# Altium PCB sensirion.PcbDoc
Units mil, origin at the board's own origin, x right, y up, seen from the top; angles counter-clockwise.
Board outline 6000 x 4000 mil, 2 copper layers (Top Layer, Bottom Layer); 60 components, 70 nets, 364 pads, 27 vias.
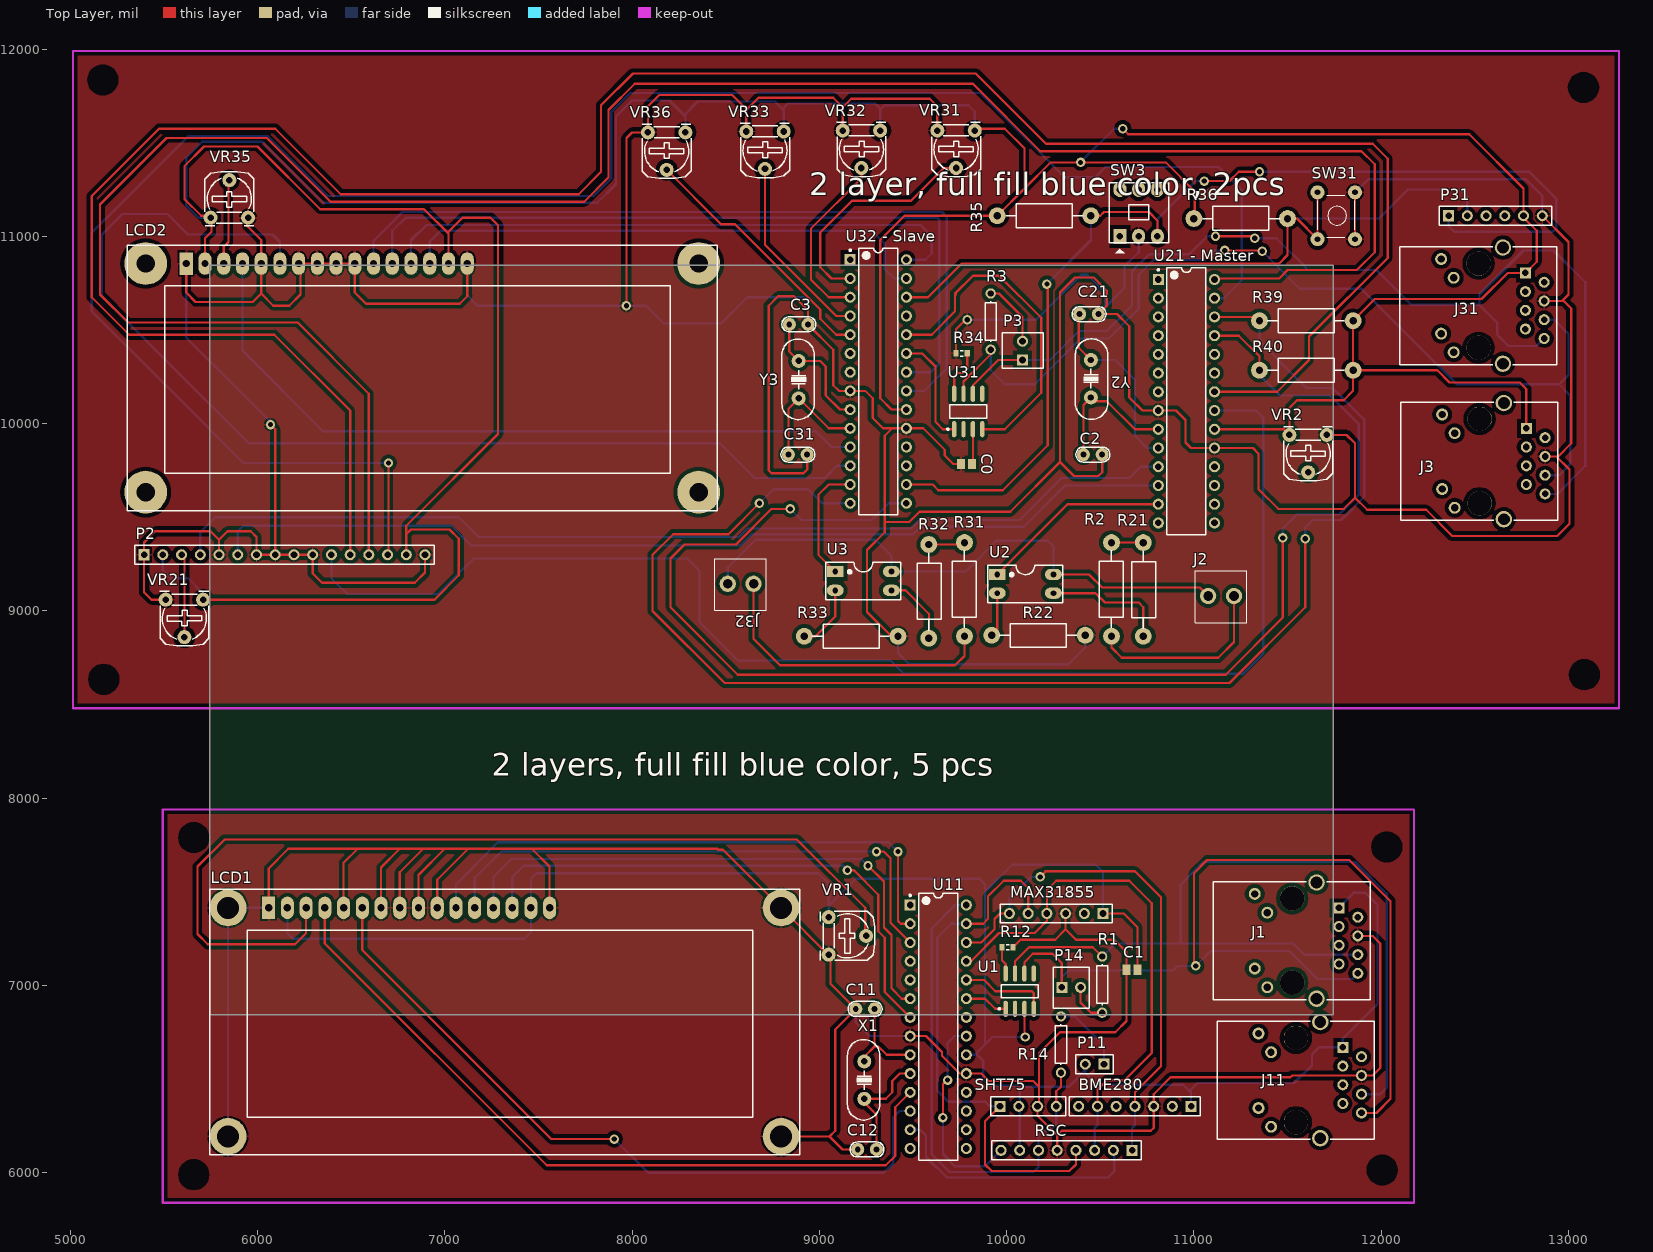
[diagram p0: Top Layer view]
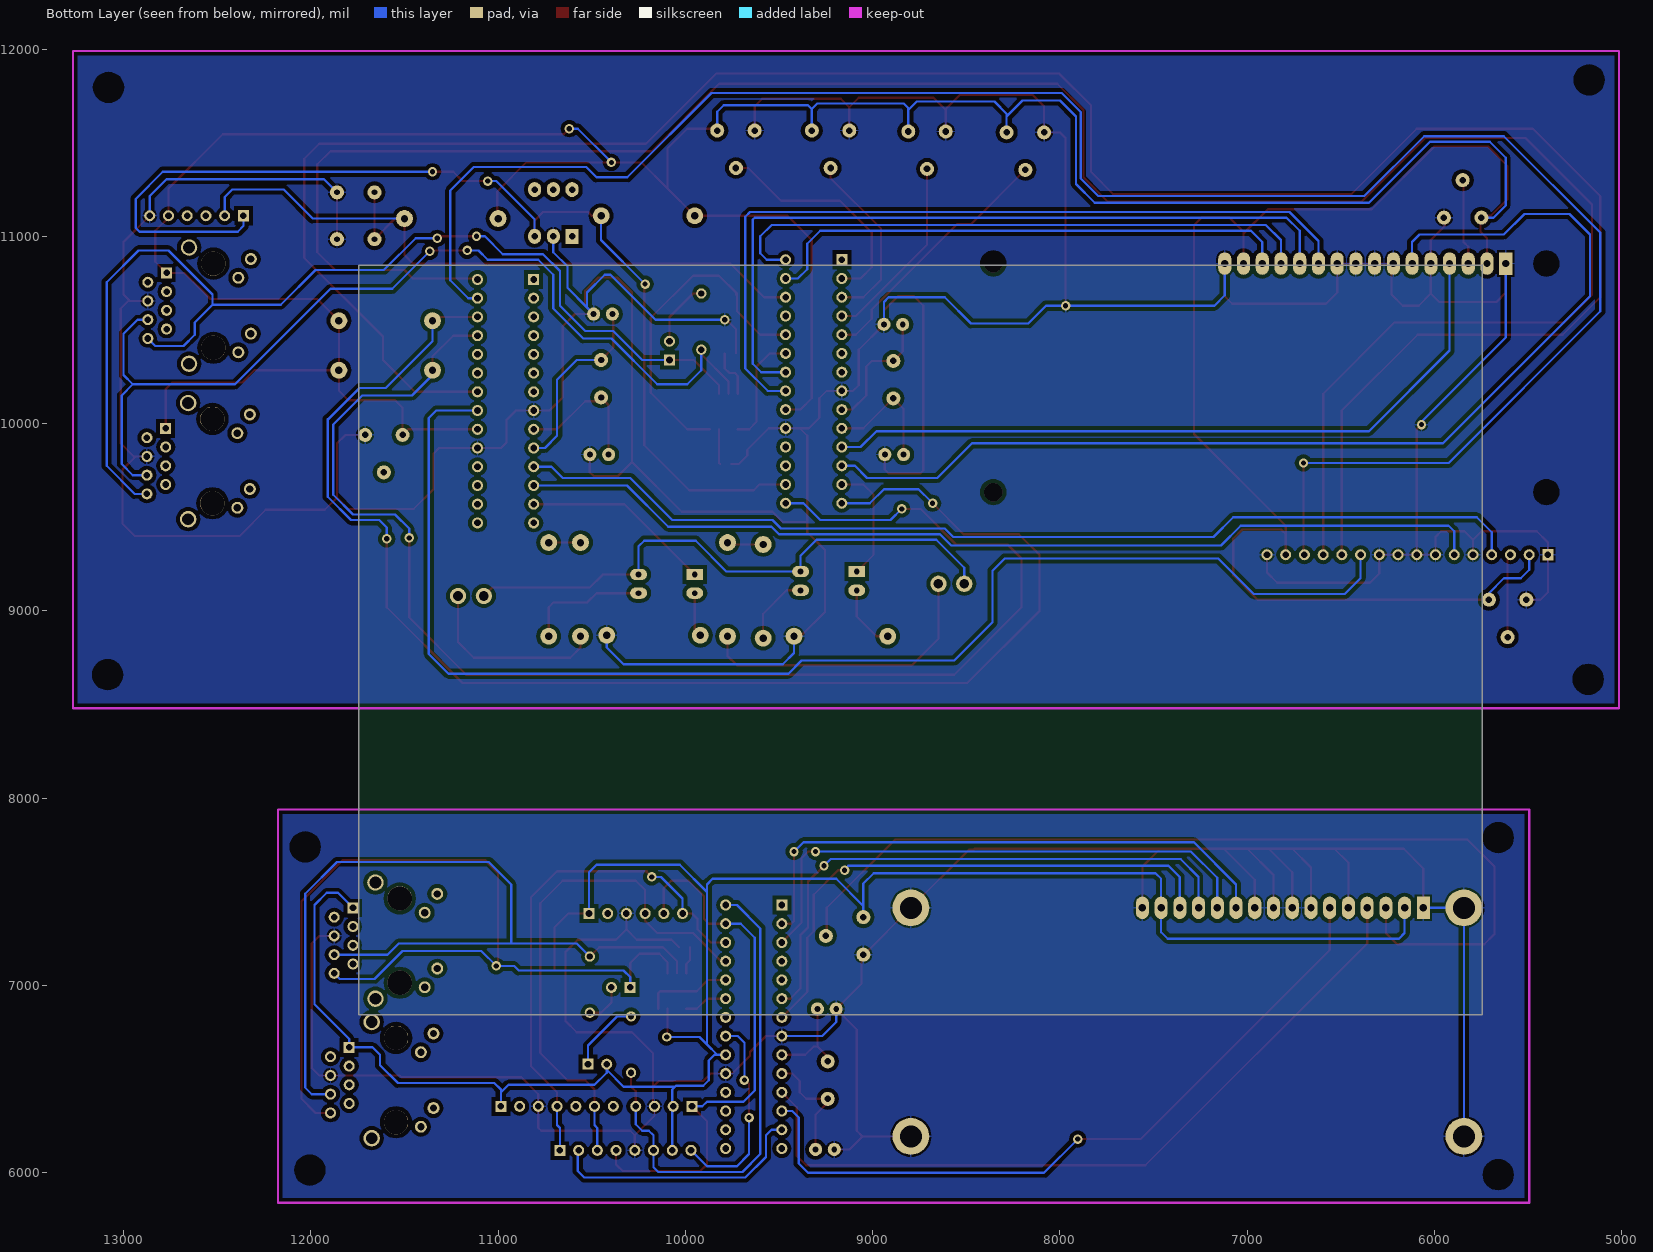
[diagram p1: Bottom Layer view, seen from below]

## Layer stack, top to bottom
Top Solder: solder mask 0.4, Solder Resist, Dk 3.5
Top Layer: signal copper 1.4
Dielectric 1: dielectric 12.6, FR-4, Dk 4.8
Bottom Layer: signal copper 1.4
Bottom Solder: solder mask 0.4, Solder Resist, Dk 3.5

## Board outline
5745,6845 11745,6845 11745,10845 5745,10845

## Design rules (kind name [scope] priority, off if disabled: settings)
Clearance "PolyGon Pour Clearance" [InPolyGon] p1: gap=20 ignorepadtopadclearanceinfootprint=FALSE except(0: Arc-Hole Track-Hole SMDPad-Hole THPad-Hole Via-Hole Fill-Hole Poly-Hole Region-Hole Text-Hole)
Clearance [All] p2: gap=14 ignorepadtopadclearanceinfootprint=FALSE except(0: Arc-Hole Track-Hole SMDPad-Hole THPad-Hole Via-Hole Fill-Hole Poly-Hole Region-Hole Text-Hole)
PolygonConnect [All] p1: connectstyle=Relief reliefconductorwidth=10 reliefentries=4 polygonreliefangle="90 Angle" airgapwidth=10
RoomDefinition BSD_Test_LM2596 [InComponentClass('BSD_Test_LM2596')] p1: confinementstyle=ConfineIn formatcopy=TRUE lockcomponents=FALSE outline 11790,6905 11930,6905 11930,7095 11790,7095
RoutingVias [All] p1: holewidth=28 width=50 viastyle="Through Hole" minholewidth=28 minwidth=50 maxholewidth=28 maxwidth=50
SolderMaskExpansion [All] p1: expansion=4
Width VCC1 [(InNet('VCC1') AND InNet('VCC'))] p1: maxlimit=14 minlimit=14 preferedwidth=14
Width [All] p2: maxlimit=12 minlimit=12 preferedwidth=12
30 further rules are at their usual default settings.

## Components (designator, comment, footprint, x,y, rotation, side; value= is the part's Value field where it differs from the comment)
BME280 "Header 7" HDR1X7 10985,6355 r180 top
C0 "Cap Pol3" C0805 9785,9785 r180 top
C1 "Cap Pol3" C0805 10670,7085 r180 top
C2 "22pF" CN1#1 10410,9835 r0 top
C3 "22pF" CN1#1 8840,10530 r0 top
C11 "22pF" CN1#2 9245,6875 r180 top
C12 "22pF" CN1#2 9255,6125 r180 top
C21 "22pF" CN1#1 10390,10585 r0 top
C31 "22pF" CN1#1 8835,9835 r0 top
J1 "CON Ethernet" Ethernet 11525,7240 r270 top
J2 "KF2" KF2-3.5 11145,9080 r0 top
J3 "CON Ethernet" Ethernet 12525,9800 r270 top
J11 "CON Ethernet" Ethernet 11545,6495 r270 top
J31 "CON Ethernet" Ethernet 12520,10630 r270 top
J32 "KF2" KF2-3.5 8580,9145 r0 top
LCD1 "LCD16x2A" LCD16X2#1 6060,7415 r0 top
LCD2 "LCD16x2A" LCD16X2#2 5620,10855 r0 top
MAX31855 "Header 6" HDR1X6 10515,7385 r180 top
P2 "Header 16" HDR1X16 5395,9300 r0 top
P3 "Header2" HDR2 10085,10340 r90 top
P11 "Header 2" HDR1X2 10520,6580 r180 top
P14 "Header2" HDR2 10295,6990 r0 top
P31 "Header 6" HDR1X6 12360,11110 r0 top
R1 "120" AXIAL-0.3 10510,7005 r270 top
R2 "100" R1W 10560,8865 r90 top
R3 "120" AXIAL-0.3 9915,10545 r90 top
R12 "Res3" J1-0603 10005,7205 r0 top
R14 "470" AXIAL-0.3 10290,6685 r270 top
R21 "100" R1W 10730,9365 r270 top
R22 "100" R1W 10420,8870 r180 top
R31 "100" R1W 9775,8865 r90 top
R32 "100" R1W 9585,9355 r270 top
R33 "100" R1W 9420,8865 r180 top
R34 "Res3" J1-0603 9760,10375 r180 top
R35 "10k" R1W 9950,11110 r0 top
R36 "10k" R1W 11000,11095 r0 top
R39 "4k7" R1W 11850,10550 r180 top
R40 "4k7" R1W 11850,10285 r180 top
RSC "Header 8" HDR1X8 10670,6120 r180 top
SHT75 "Header 4" HDR1X4 9965,6355 r0 top
SW3 "Switch 3x2" SW3-DIP 10705,11130 r90 top
SW31 "SW" SW4 11860,11235 r270 top
U1 "MCP2551-E/SN" SOIC-SN8_N 10070,6970 r90 top
U2 "PC817" DIP4 9950,9195 r270 top
U3 "PC817" DIP4 9085,9210 r270 top
U11 "PIC18LF2480-I/SP" SPDIP300-SP28 9635,6780 r0 top
"U21 - Master" "PIC18LF2480-I/SP" SPDIP300-SP28 10960,10120 r0 top
U31 "MCP2551-E/SN" SOIC-SN8_N 9795,10065 r90 top
"U32 - Slave" "PIC18LF2480-I/SP" SPDIP300-SP28 9315,10225 r0 top
VR1 "10K" VR 9050,7365 r270 top
VR2 "10K" VR 11710,9940 r180 top
VR21 "10K" VR 5710,9060 r180 top
VR31 "10K" VR 9830,11565 r180 top
VR32 "10K" VR 9325,11565 r180 top
VR33 "10K" VR 8810,11560 r180 top
VR35 "10K" VR 5750,11100 r0 top
VR36 "10K" VR 8285,11555 r180 top
X1 "12Mhz" XT2 9240,6495 r90 top
Y2 "12Mhz" XT2 10450,10240 r270 top
Y3 "12Mhz" XT2 8890,10235 r90 top

## Footprints (in the part's own frame and the unit in brackets; to place one, negate y for a bottom-side part, rotate by r counter-clockwise, add the part's x,y. Pads: shape width x height; smd on the part's side, far side on the other; paste and mask are expansions set on the pad)
AXIAL-0.3 [mm] "Axial Device, Thru-Hole; 2 Leads; 0.3 in Pin Spacing"
  round 1.4 hole 0.85: 1(-3.81,0) 2(3.81,0)
  silkscreen extent -2.77,-0.76 2.77,0.76
C0805 [mm] "Chip Capacitor, Body 2.0x1.3mm, IPC High Density"
  rect 1.1x1.4 smd: 1(-0.75,0) 2(0.75,0)
  body extent -1.1,-0.72 1.1,0.72, height 1.4
CN1#1 [mil]
  round 70 hole 31: 1(0,0) 2(100,0)
  silkscreen extent -40,-40 141,40, body extent -60,-30 170,37, height 265
CN1#2 [mil]
  round 70 hole 31: 1(-50,0) 2(50,0)
  silkscreen extent -90,-40 91,40, body extent -115,-33 115,33, height 265
DIP4 [mil]
  rect 60x90 hole 31: 1(0,0)
  oval 60x90 hole 31: 2(100,0) 3(100,300) 4(0,300)
  silkscreen extent -50,-50 150,350, body extent -59,-10 159,305, height 170
Ethernet [mm] "Connector; PCB Jack, Thru-Hole; 1-Port, 8 Positions, 8 Loaded; Shielded without Lightpipes; Vertical"
  rect 1.5x1.5 hole 0.9: 1(-4.445,6.35)
  round 1.5 hole 0.9: 2(-3.175,8.89) 3(-1.905,6.35) 4(-0.635,8.89) 5(0.635,6.35) 6(1.905,8.89) 7(3.175,6.35)
  round 1.5 hole 0.9 mask+0: 8(4.445,8.89)
  round 1.62 hole 1: 9(-6.325,-5.08) 11(3.785,-5.08) 12(6.325,-3.38)
  round 1.62 hole 1 mask+0: 10(-3.785,-3.38)
  round 2.23 hole 1.6: MH1(-7.875,3.3) MH2(7.875,3.3)
  round 3.3 hole 3.3 unplated: MH3(-5.715,0) MH4(5.715,0)
  silkscreen extent -8,-10.7 8,10.6, body extent -7.9,-145.27 7.97,10.6, height 24.61
HDR1X2 [mm] "Connector; Header; 2 Position"
  rect 1.5x1.5 hole 0.9: 1(0,0)
  round 1.5 hole 0.9: 2(2.54,0)
  silkscreen extent -1.27,-1.27 3.81,1.27
HDR1X4 [mm] "Connector; Header; 4 Position"
  rect 1.5x1.5 hole 0.9: 1(0,0)
  round 1.5 hole 0.9: 2(2.54,0) 3(5.08,0) 4(7.62,0)
  silkscreen extent -1.27,-1.27 8.89,1.27
HDR1X6 [mm] "Connector; Header; 6 Position"
  rect 1.5x1.5 hole 0.9: 1(0,0)
  round 1.5 hole 0.9: 2(2.54,0) 3(5.08,0) 4(7.62,0) 5(10.16,0) 6(12.7,0)
  silkscreen extent -1.27,-1.27 13.97,1.27
HDR1X7 [mm] "Connector; Header; 7 Position"
  rect 1.5x1.5 hole 0.9: 1(0,0)
  round 1.5 hole 0.9: 2(2.54,0) 3(5.08,0) 4(7.62,0) 5(10.16,0) 6(12.7,0) 7(15.24,0)
  silkscreen extent -1.27,-1.27 16.51,1.27
HDR1X8 [mm] "Connector; Header; 8 Position"
  rect 1.5x1.5 hole 0.9: 1(0,0)
  round 1.5 hole 0.9: 2(2.54,0) 3(5.08,0) 4(7.62,0) 5(10.16,0) 6(12.7,0) 7(15.24,0) 8(17.78,0)
  silkscreen extent -1.27,-1.27 19.05,1.27
HDR1X16 [mm] "Connector; Header; 16 Position"
  rect 1.5x1.5 hole 0.9: 1(0,0)
  round 1.5 hole 0.9: 2(2.54,0) 3(5.08,0) 4(7.62,0) 5(10.16,0) 6(12.7,0) 7(15.24,0) 8(17.78,0) 9(20.32,0) 10(22.86,0) 11(25.4,0) 12(27.94,0) 13(30.48,0) 14(33.02,0) 15(35.56,0) 16(38.1,0)
  silkscreen extent -1.27,-1.27 39.37,1.27
HDR2 [mm] "Connector; Header; 2 Position"
  rect 1.5x1.5 hole 0.9: 1(0,0)
  round 1.5 hole 0.9: 2(2.54,0)
  silkscreen extent -1.14,-2.79 3.68,2.77, body extent -1.27,-2.92 3.81,2.88, height 11.72
J1-0603 [mm] "Chip Resistor, Body 1.6x0.8mm, IPC High Density"
  rect 0.7x0.9 smd: 1(-0.75,0) 2(0.75,0)
  silkscreen extent -0.2,-0.35 0.2,0.35, body extent -0.85,-0.48 0.85,0.48, height 0.9
KF2-3.5 [mm] "3,50mm - modular - blue - Horizontal wire entry - Pressure clamp - 8,4mm height - 02p"
  round 2.2 hole 1.3: 1(-1.75,0) 2(1.75,0)
  silkscreen extent -3.5,-3.6 3.5,3.4, body extent -3.95,-3.6 4.05,3.4, height 8.41
LCD16X2#1 [mm] "LCD dipslay 16x2, 16 pin"
  round 5 hole 3: 1(-5.5,-31) 1(-5.5,0) 1(69.5,-31) 1(69.5,0)
  rect 1.778x3.048 hole 1: 1(0,0)
  oval 1.778x3.048 hole 1: 2(2.54,0) 3(5.08,0) 4(7.62,0) 5(10.16,0) 6(12.7,0) 7(15.24,0) 8(17.78,0) 9(20.32,0) 10(22.86,0) 11(25.4,0) 12(27.94,0) 13(30.48,0) 14(33.02,0) 15(35.56,0) 16(38.1,0)
  round 0 all layers, no hole: ""(-5.5,0)
  silkscreen extent -8,-33.5 72,2.5, body extent -7.87,-33.96 72.64,2.54, height 18.14
LCD16X2#2 [mm] "LCD dipslay 16x2, 16 pin"
  rect 1.778x3.048 hole 1: 1(0,0)
  oval 1.778x3.048 hole 1: 2(2.54,0) 3(5.08,0) 4(7.62,0) 5(10.16,0) 6(12.7,0) 7(15.24,0) 8(17.78,0) 9(20.32,0) 10(22.86,0) 11(25.4,0) 12(27.94,0) 13(30.48,0) 14(33.02,0) 15(35.56,0) 16(38.1,0)
  round 5.8 / inner round 0 / far side round 0 hole 2.5 unplated: M1(-5.5,0) M2(69.5,0) M3(-5.5,-31) M4(69.5,-31)
  silkscreen extent -8,-33.5 72,2.5, body extent -8.13,-34.47 72.37,2.03, height 18.14
R1W [mil] "R 1W, 2 pin, 500mil"
  round 90 hole 39.37: 1(0,0) 2(500,0)
  silkscreen extent 46,-63 460,65
SOIC-SN8_N [mm] "SOIC, 8-Leads, Body 4.9x3.8mm, Pitch 1.27mm, IPC Medium Density"
  oval 2.2x0.6 smd: 1(-2.4,1.905) 2(-2.4,0.635) 3(-2.4,-0.635) 4(-2.4,-1.905) 5(2.4,-1.905) 6(2.4,-0.635) 7(2.4,0.635) 8(2.4,1.905)
  silkscreen extent -2.52,-2.5 0.9,2.88, body extent -2,-2.5 2,2.5, height 1.75
SPDIP300-SP28 [mm] "DIP, 28-Leads, Row Spacing 7.62mm, Pitch 2.54mm, Body 34.9x6.8mm"
  rect 1.5x1.5 hole 0.9: 1(-3.81,16.51)
  round 1.5 hole 0.9: 2(-3.81,13.97) 3(-3.81,11.43) 4(-3.81,8.89) 5(-3.81,6.35) 6(-3.81,3.81) 7(-3.81,1.27) 8(-3.81,-1.27) 9(-3.81,-3.81) 10(-3.81,-6.35) 11(-3.81,-8.89) 12(-3.81,-11.43) 13(-3.81,-13.97) 14(-3.81,-16.51) 15(3.81,-16.51) 16(3.81,-13.97) 17(3.81,-11.43) 18(3.81,-8.89) 19(3.81,-6.35) 20(3.81,-3.81) 21(3.81,-1.27) 22(3.81,1.27) 23(3.81,3.81) 24(3.81,6.35) 25(3.81,8.89) 26(3.81,11.43) 27(3.81,13.97) 28(3.81,16.51)
  silkscreen extent -3.93,-18.1 2.65,18.1, body extent -3.55,-18.1 3.55,18.1, height 5.08
SW3-DIP [mil] "SW DTDP - 6Pin 260x300x300 mil"
  rect 80x70 hole 35: 1(-130,100)
  oval 80x70 hole 35: 2(-130,0) 3(-130,-100) 4(120,-100) 5(120,0) 6(120,100)
  silkscreen extent -220,-160 155,158, body extent -163,-159 151,155, height 532
SW4 [mil] "SW button 4pin, 250 x250 mil"
  round 75 hole 31: 1(0,0) 2(250,-200) 3(250,0) 4(0,-200)
  silkscreen extent 15,-215 240,0, body extent -36,-220 276,24, height 276
VR [mil] "Resistor Variable"
  round 75 hole 35: 1(0,0) 2(100,200) 3(200,0)
  silkscreen extent -31,-44 231,246, body extent -87,-30 307,372, height 165
XT2 [mil] "Footpin for Crystal 2 pin"
  round 75 hole 34: 1(-100,0) 2(100,0)
  silkscreen extent -213,-83 217,90, body extent -216,-87 216,90, height 144

## Part data
BME280: "Header, 7-Pin"
C0 C1: "Polarized Capacitor (Surface Mount)"
C2 C3 C11 C12 C21 C31: library part CN0, "Cremic For Xtal 1pF => 100pF"
J1 J3 J11 J31: "Socket, PC Jack 8-Way, R/A Low-profile"
LCD1 LCD2: library part LCD16x2, "LCD dipslay 16 char, 2 line"
MAX31855 P31: "Header, 6-Pin"
P2: "Header, 16-Pin"
P3 P14: "Header IDC, 2 x 1 Pin Vertical 2.54mm Pitch (Non-Boxed, Male)"
P11: "Header, 2-Pin"
R1 R3: library part Res, "Res"
R2 R21 R22 R31 R32 R33 R35 R36 R39 R40: library part R1W, "Resistor 1W"
R12 R34: "Resistor"
R14: library part Res1, "Resistor"
RSC: "Header, 8-Pin"
SHT75: "Header, 4-Pin"
SW3: library part SW3x2
SW31: library part SW4, "Switch button 4 pin"
U1 U31: "High-Speed CAN Transceiver, 8-Pin SOIC, Extended Temperature"
U2 U3: "Single Opto"
U11 "U21 - Master" "U32 - Slave": "Enhanced Flash Microcontroller with ECAN Technology, 10-Bit A/D and nanoWatt Technology, 16K Flash, 28-Pin SPDIP, Industrial Temperature Range"
VR1 VR2 VR21 VR31 VR32 VR33 VR35 VR36: library part VR1, "Var Resistor"
X1 Y2 Y3: library part XT2, "Crystal, 32.768 KHz, -40 to 85 degC, 3.2 x 1.5 x 0.9 mm SMD"

## Free pads (board coordinates)
  round 60 hole 125: 0(5660,5990) 1(12005,6015) 2(5660,7790) 3(12030,7740) 4(5175,11835) 5(13080,11795) 6(13085,8660) 7(5180,8635)

## Via types
v1: diameter 50, hole 28, Top Layer to Bottom Layer, 27 vias

## Nets (pads, with @x,y where several pads share a name; then routed paths per layer and width w, separated by ;. In a path a pad name is that pad's centre, name@x,y a point inside that pad or via, vN(x,y) a via of type N, cw(c..) or ccw(c..) an arc to the next point about the centre after c; other vN are vias at no path point)
12VDC: J2.1 J32.1 U2.4 U3.4 | length 3111.4
  Top Layer w12: U2.4 10440,9195 10510,9125 11031.1,9125 J2.1
  Bottom Layer w12: J32.1 8511.1,9231.1 8660,9380 9300,9380 9385,9295 U3.4 9780,9210 9945,9375 10220,9375 10250,9345 U2.4
GND: "U21 - Master.8" "U21 - Master.19" "U32 - Slave.8" "U32 - Slave.19" C0.2 C2.2 C3.2 C21.2 C31.2 J3.4 J31.4 LCD2.1 LCD2.5 LCD2.7 LCD2.8 LCD2.9 LCD2.10 LCD2.16 P2.1 P2.5 P2.7 P2.8 P2.9 P2.10 P2.16 P31.6 R22.1 R33.1 R34.2 SW3.2 SW31.1 SW31.3 VR2.1 VR21.3 VR31.3 VR32.3 VR33.3 VR35.3 VR36.3 | length 29365.1
  Top Layer w12: VR21.3 5435,9060 5395,9100 P2.1 5395,9365 5455,9425 5750,9425 5795,9380 ; LCD2.1 5620,10700 5670,10650 5975,10650 6020,10695 ; P2.5 5795,9380 ; VR35.3@5955,11110 5955,11100 5945,11090 5945,11055 6020,10980 LCD2.5 6020,10695 ; v1(6070,9995) 6095,9970 P2.8 ; LCD2.7 LCD2.8 LCD2.9 LCD2.10 6520,10700 6580,10640 7080,10640 7122.5,10682.5 7120,10685 LCD2.16 ; LCD2.7@6230,10845 6230,10690 6170,10630 6085,10630 6020,10695 ; P2.16 6895,9205 6840,9150 6345,9150 6295,9200 P2.10 P2.9 P2.8 ; v1(7970,10630) 7970,11525 8000,11555 VR36.3 ; VR36.3@8085,11570 8085,11695 8145,11755 8535,11755 8610,11680 8610,11675 ; VR33.3@8610,11575 8610,11675 ; C31.2 8935,9755 8915,9735 8745,9735 8730,9750 8730,10630 8780,10680 8865,10680 8940,10605 C3.2 9075,10395 9075,10205 9105,10175 9165,10175 9245,10175 9285,10135 9285,10030 9340,9975 9390,9975 ; VR32.3@9125,11575 9125,11690 ; R33.1 9385,8865 9255,8995 9255,9325 9350,9420 9350,9475 ; VR31.3@9630,11575 9630,11695 9590,11735 9170,11735 9125,11690 ; R34.2 9730.47,10505.47 9780,10555 v1(9790,10555) ; C0.2 9715,9785 9670,9830 9670,9860 9555,9975 9465,9975 9390,9975 ; C2.2 10510,9740 10490,9720 10360,9720 10285,9795 ; VR2.1 11815,9940 11860,9895 11860,9605 ; SW31.3 SW31.1 ; P31.6 13000,10970 13000,10690 12965,10655 ; J31.4 12965,10655 ; J3.4 12935,9825 ; 5795,9380 5840,9425 5965,9425 5995,9395 P2.7 P2.8 ; 8610,11675 8675,11740 9075,11740 9125,11690 ; 9350,9475 9480,9475 9535,9530 10020,9530 10285,9795 ; 9350,9475 9350,9935 9390,9975 ; 10285,9795 10285,10700 10365,10780 10465,10780 10535,10710 10535,10630 C21.2 10590,10585 10655,10520 10655,10140 10725,10070 10810,10070 10905,10070 10955,10020 10955,9900 10985,9870 11110,9870 11315,9870 11345,9840 11345,9650 11450,9545 11800,9545 11860,9605 ; 11860,9605 11925,9540 12240,9540 12380,9400 12940,9400 13005,9465 13005,9755 12935,9825 ; 12935,9825 12945,9825 13015,9895 13015,10615 12975,10655 12965,10655
  Bottom Layer w12: LCD2.1 5620,10460 6070,10010 v1(6070,9995) ; LCD2.16 7120,10685 7175,10630 8075,10630 8170,10535 8475,10535 8615,10675 8915,10675 8940,10650 C3.2 ; R33.1 9420,8775 9480,8715 10330,8715 10420,8805 R22.1 ; v1@9800,10555 10160,10555 10400,10795 10430,10795 10525,10700 10525,10620 ; C21.2 10525,10620 ; SW3.2 10705,10915 10630,10840 10630,10725 10525,10620 ; SW31.1 11930,11305 12770,11305 12860,11215 P31.6
GND1: BME280.3 C1.2 C11.2 C12.2 J1.4 J11.4 LCD1.1 LCD1.5 LCD1.7 LCD1.8 LCD1.9 LCD1.10 LCD1.16 MAX31855.3 R12.2 RSC.5 SHT75.3 U11.8 U11.19 VR1.3 | length 14857.3
  Top Layer w12: LCD1.1@6060,7415 6060,7625 6165,7730 6535,7730 ; LCD1.5 6460,7655 6535,7730 ; LCD1.7 6660,7630 6760,7730 ; LCD1.8 6760,7605 6885,7730 ; LCD1.9 6860,7590 7000,7730 ; LCD1.10 6960,7565 7125,7730 ; LCD1.16 7560,7635 7465,7730 ; LCD1.1@8796.22,6194.53 9054.53,6194.53 ; C12.2 9124.06,6125 9054.53,6194.53 ; U11.8 9570,6730 9655,6645 9655,6625 9750,6530 U11.19 9865,6530 9905,6490 10142.81,6490 10172.81,6460 ; R12.2 10074.53,7245 10260,7245 10315,7300 ; RSC.5 10270,6200 ; MAX31855.3 10315,7300 ; J1.4 11955,7265 11995,7225 11995,6560 11955,6520 J11.4 11525,6520 11515,6510 10875,6510 10785,6420 BME280.3 10785,6240 10770,6225 10295,6225 10270,6200 ; 6535,7730 6760,7730 ; 6760,7730 6885,7730 ; 6885,7730 7000,7730 ; 7000,7730 7125,7730 ; 7125,7730 7465,7730 ; 7465,7730 8455,7730 8460,7725 8486.22,7725 8796.22,7415 9046.22,7165 VR1.3 9060,7155 9060,7010 C11.2 9085,6765 9085,6225 9054.53,6194.53 ; 10172.81,6460 10172.81,6362.81 SHT75.3 10165,6305 10270,6200 ; 10172.81,6460 10172.81,6637.81 10285,6750 10580,6750 10640.47,6810.47 C1.2 10640.47,7179.53 10575,7245 10370,7245 10315,7300
  Bottom Layer w12: LCD1.1@5843.46,6194.53 5843.46,7415 LCD1.1@6060,7415 ; C11.2 9195,6805 9270,6730 U11.8
NetBME280_4: BME280.4 MAX31855.6 RSC.1 U11.26 | length 2751.6
  Top Layer w12: U11.26 9865,7230 9935,7300 9935,7355 9965,7385 MAX31855.6 ; v1(10180,7580) 10205,7605 10205,7610 10685,7610 10825,7470 10825,6570 10685,6430 BME280.4
  Bottom Layer w12: MAX31855.6 10015,7465 10130,7580 v1(10180,7580) ; RSC.1 10670,6240 10685,6255 BME280.4
NetBME280_6: BME280.6 MAX31855.4 RSC.3 U11.25 | length 2816.5
  Top Layer w12: U11.25 9810,7130 9960,7280 10150,7280 10215,7345 MAX31855.4 10215,7510 10265,7560 10655,7560 10775,7440 10775,6640 10630,6495 10535,6495 10485,6445 BME280.6
  Bottom Layer w12: RSC.3 10470,6240 10485,6255 BME280.6
NetC0_1: C0.1 U31.3 | length 187.8
  Top Layer w12: C0.1 9820,9790.47 U31.3
NetC2_1: "U21 - Master.9" C2.1 Y2.2 | length 752
  Top Layer w12: C2.1 10410,10100 Y2.2 10470,10120 10535,10120 10685,9970 10810,9970
NetC3_1: "U32 - Slave.9" C3.1 Y3.2 | length 689.2
  Top Layer w12: C3.1 8840,10385 Y3.2 9005,10335 9035,10305 9035,10150 9110,10075 9165,10075
NetC11_1: C11.1 U11.9 X1.2 | length 511.4
  Top Layer w12: X1.2 9240,6620 9295,6675 ; C11.1 9295,6675 ; U11.9 9360,6630 9315,6675 9295,6675
NetC12_1: C12.1 U11.10 X1.1 | length 633
  Top Layer w12: C12.1 9305,6310 9240,6375 X1.1 9355,6395 9390,6430 9390,6490 9430,6530 U11.10
NetC21_1: "U21 - Master.10" C21.1 Y2.1 | length 1004.4
  Top Layer w12: C21.1 10385,10580 10385,10405 Y2.1
  Bottom Layer w12: Y2.1 10580,10340 10685,10235 10685,9935 10750,9870 10810,9870
NetC31_1: "U32 - Slave.10" C31.1 Y3.1 | length 664.1
  Top Layer w12: C31.1 8835,10080 Y3.1 9050,9975 9165,9975
NetJ1_6: J1.6 J11.6 R1.1 U1.7 | length 4720.8
  Top Layer w12: U1.7 10045,7130 10120,7205 10460,7205 R1.1
  Bottom Layer w12: R1.1 10580,7225 10930,7225 ; J1.6 11590,7165 11530,7225 10930,7225 ; J11.6 11995,6420 12030,6455 12030,7490 11860,7660 11050,7660 10930,7540 10930,7225
NetJ1_8: J1.8 J11.8 P14.1 U1.6 | length 5107.7
  Top Layer w12: U1.6 10095,7125 10140,7170 10245,7170 10295,7120 P14.1 ; v1(11010,7105) 11000,7115 11000,7600 11070,7670 11830,7670 12050,7450 12050,6395 11975,6320 J11.8
  Bottom Layer w12: P14.1 10295,7045 10330,7080 10890,7080 10915,7105 v1(11010,7105) 11090,7185 11510,7185 11660,7035 11845,7035 J1.8
NetJ2_2: J2.2 R2.1 | length 1017.5
  Top Layer w12: R2.1 10560,8805 10615,8750 11130,8750 11213.9,8833.9 J2.2
NetJ3_6: J3.6 J31.6 R3.1 U31.7 | length 5223.8
  Top Layer w12: U31.7 9770,10225 9915,10370 R3.1 ; v1(11165,10925) v1@11360,10925
  Bottom Layer w12: R3.1 9915,10285 9990,10210 10150,10210 10395,10455 10545,10455 10705,10615 10705,10795 10785,10875 11055,10875 11105,10925 v1(11165,10925) ; v1(11365,10920) 11565,10720 11895,10720 12405,10210 12950,10210 ; J31.6 12925,10555 13000,10480 13000,10260 12950,10210 ; J3.6 12950,9725 13010,9785 13010,10150 12950,10210
NetJ3_8: J3.8 J31.8 P3.1 U31.6 | length 5902.1
  Top Layer w12: U31.6 9820,10205 9955,10340 P3.1 ; v1(11115,11000) 11310,11000 11310,10990 11325,10975 v1(11325,10990)
  Bottom Layer w12: P3.1 10230,10340 10385,10495 10535,10495 10670,10630 10670,10815 10760,10905 10975,10905 11070,11000 v1(11115,11000) ; v1(11325,10990) 11440,10990 11610,10820 11975,10820 12160,10635 12525,10635 ; J31.8 12830,10415 12680,10415 12620,10475 12620,10540 12525,10635 ; J3.8 12940,9625 13090,9775 13090,10755 12920,10925 12760,10925 12525,10690 12525,10635
NetJ32_2: J32.2 R31.1 | length 1608.3
  Top Layer w12: J32.2 8648.9,8851.1 8790,8710 9725,8710 9775,8760 9775,8855 R31.1@9785,8865
NetLCD1_3: LCD1.3 VR1.2 | length 5051
  Top Layer w12: LCD1.3 6260,7280 6200,7220 5735,7220 5680,7275 5680,7635 5825,7780 8880,7780 9245,7415 9245,7270 VR1.2
NetLCD1_4: LCD1.4 U11.11 | length 4119.7
  Top Layer w12: LCD1.4 6360,7225 7545,6040 9355,6040 9405,6090 9405,6350 U11.11
NetLCD1_6: LCD1.6 U11.12 | length 3918.1
  Top Layer w12: LCD1.6 6560,7190 7570,6180 v1@7900,6180
  Bottom Layer w12: v1(7905,6180) 8085,6000 9345,6000 9395,6050 9395,6295 9430,6330 U11.12
NetLCD1_11: LCD1.11 U11.2 | length 3040.1
  Top Layer w12: v1(9420,7715) 9420,7345 9435,7330 U11.2
  Bottom Layer w12: LCD1.11 7060,7540 7285,7765 9370,7765 v1(9420,7715)
NetLCD1_12: LCD1.12 U11.3 | length 2946
  Top Layer w12: v1(9305,7715) 9345,7715 9380,7680 9380,7335 U11.3
  Bottom Layer w12: LCD1.12 7160,7575 7300,7715 v1(9305,7715)
NetLCD1_13: LCD1.13 U11.6 | length 3048.4
  Top Layer w12: v1(9260,7640) 9345,7555 9345,7310 9385,7270 9385,6985 9440,6930 U11.6
  Bottom Layer w12: LCD1.13 7260,7580 7355,7675 9225,7675 v1(9260,7640)
NetLCD1_14: LCD1.14 U11.7 | length 2918.3
  Top Layer w12: v1(9150,7615) 9185,7615 9315,7485 9315,7290 9350,7255 9350,6965 U11.7
  Bottom Layer w12: LCD1.14 7360,7580 7420,7640 9130,7640 v1@9140,7630
NetLCD2_3: LCD2.3 VR35.2 | length 455.4
  Top Layer w12: LCD2.3 5820,10945 5845,10970 VR35.2@5845,11300
NetLCD2_4: "U32 - Slave.11" LCD2.4 | length 3923.3
  Bottom Layer w12: LCD2.4 5920,10390 6350,9960 8980,9960 9065,9875 9165,9875
NetLCD2_6: "U32 - Slave.12" LCD2.6 | length 5926.4
  Bottom Layer w12: LCD2.6 6120,10970 6080,11010 5630,11010 5520,11120 5280,11120 5170,11010 5170,10680 5955,9895 8470,9895 8655,9710 9030,9710 9095,9775 9165,9775
NetLCD2_11: "U32 - Slave.21" LCD2.11 | length 4329.3
  Bottom Layer w12: LCD2.11 6620,10975 6775,11130 9655,11130 9680,11105 9680,10295 9560,10175 9465,10175
NetLCD2_12: "U32 - Slave.22" LCD2.12 | length 4091.8
  Bottom Layer w12: LCD2.12 6720,11030 6790,11100 9630,11100 9640,11090 9640,10320 9595,10275 9465,10275
NetLCD2_13: "U32 - Slave.28" LCD2.13 | length 3202.5
  Bottom Layer w12: LCD2.13 6820,10980 6900,11060 9540,11060 9600,11000 9600,10910 9565,10875 9465,10875
NetLCD2_14: "U32 - Slave.27" LCD2.14 | length 2869.6
  Bottom Layer w12: LCD2.14 6920,10970 6980,11030 9280,11030 9350,10960 9350,10825 9400,10775 9465,10775
NetMAX31855_5: MAX31855.5 RSC.4 SHT75.1 U11.27 | length 2950.5
  Top Layer w12: U11.27 9875,7330 9900,7355 9900,7475 9985,7560 10075,7560 10115,7520 MAX31855.5 ; SHT75.1 9885,6275 9885,6045 9920,6010 10335,6010 10370,6045 RSC.4
  Bottom Layer w12: U11.27 9705,7330 9630,7255 9630,6440 9690,6380 9885,6380 9910,6355 SHT75.1
NetP2_3: P2.3 VR21.2 | length 446.2
  Top Layer w12: P2.3 5610,9285 VR21.2
NetP2_4: "U21 - Master.11" P2.4 | length 5467
  Bottom Layer w12: P2.4 5695,9420 5775,9500 7075,9500 7180,9395 8570,9395 8615,9440 9490,9440 9535,9485 10070,9485 10295,9710 10655,9710 10715,9770 10810,9770
NetP2_6: "U21 - Master.12" P2.6 | length 5228.5
  Bottom Layer w12: P2.6 5895,9425 5925,9455 7035,9455 7140,9350 8580,9350 8640,9410 9500,9410 9540,9450 10091.77,9450 10311.77,9670 10810,9670
NetP2_11: "U21 - Master.21" P2.11 | length 7209.8
  Bottom Layer w12: P2.11 6395,9175 6480,9090 6965,9090 7155,9280 8295,9280 8360,9215 8360,8940 8565,8735 9380,8735 9450,8665 11265,8665 11370,8770 11370,10030 11330,10070 11110,10070
NetP2_12: "U21 - Master.22" P2.12 | length 12642.7
  Top Layer w12: P2.12 6495,10070 6090,10475 5315,10475 5115,10675 5115,11215 5475,11575 6095,11575 6445,11225 7715,11225 7835,11345 7835,11700 8005,11870 9835,11870 10210,11495 11955,11495 12035,11415 12035,10885 11615,10465 11615,10340 11445,10170 11110,10170
NetP2_13: "U21 - Master.28" P2.13 | length 12122.4
  Top Layer w12: P2.13 6595,10160 6215,10540 5310,10540 5160,10690 5160,11170 5515,11525 6050,11525 6390,11185 7745,11185 7875,11315 7875,11675 8015,11815 9820,11815 10180,11455 11895,11455 11965,11385 11965,10915 11870,10820 11500,10820 11455,10775 11115,10775 11110,10770
NetP2_14: "U21 - Master.27" P2.14 | length 10672.5
  Top Layer w12: P2.14 6700,9305 v1(6700,9790)
  Bottom Layer w12: v1(6700,9790) 5925,9790 5115,10600 5115,11020 5630,11535 6055,11535 6375,11215 7795,11215 7889,11309 7889,11664 7990,11765 9860,11765 10310,11315 10475,11315 10530,11370 11130,11370 ; 11110,10670 11160,10670 11255,10765 11255,11245 11135,11365
NetP3_2: P3.2 R3.2 | length 351.8
  Top Layer w12: R3.2 9960,10695 10085,10570 P3.2
NetP11_1: P11.1 R14.1 | length 394.2
  Bottom Layer w12: R14.1 10365,6835 10520,6680 P11.1
NetP14_2: P14.2 R1.2 | length 217.8
  Top Layer w12: P14.2 10395,6910 10450,6855 R1.2
NetP31_1: "U32 - Slave.16" P31.1 R35.2 SW3.3 | length 5837.5
  Top Layer w12: 9465,9675 9605,9675 9635,9645 9980,9645 10220,9885 v1@10220,10735 ; R35.2 10500,11110 10520,11130 10760,11130 10805,11085 SW3.3 ; v1(11055,11295) 11190,11295 11240,11345 v1(11350,11345)
  Bottom Layer w12: v1(10215,10745) 10450,10980 R35.2 ; SW3.3 10805,11090 11010,11295 v1(11055,11295) ; v1(11350,11345) 12790,11345 12935,11200 12935,11045 12915,11025 12390,11025 12360,11055 P31.1
NetP31_2: "U32 - Slave.26" P31.2 R36.2 SW31.2 SW31.4 | length 3919.5
  Top Layer w12: 9465,10675 9580,10675 9760,10855 11455,10855 11500,10900 R36.2 11550,11095 SW31.2 SW31.4
  Bottom Layer w12: R36.2 11990,11095 12145,11250 12420,11250 12460,11210 P31.2
NetR2_2: R2.2 R21.1 | length 170
  Top Layer w12: R2.2 R21.1
NetR12_1: R12.1 U1.8 | length 148.6
  Top Layer w12: R12.1 9975.47,7134.53 9995,7115 U1.8
NetR14_2: R14.2 RSC.6 SHT75.4 U11.28 | length 2636.7
  Top Layer w12: SHT75.4 10265,6435 10290,6460 R14.2
  Bottom Layer w12: U11.28 9725,7430 9600,7305 9600,6100 9695,6005 10145,6005 10170,6030 RSC.6 10170,6200 10195,6225 10230,6225 10265,6260 SHT75.4
NetR21_2: R21.2 U2.3 | length 666.1
  Top Layer w12: U2.3 10475,9095 10525,9045 10705,9045 10730,9020 R21.2
NetR22_2: R22.2 U2.2 | length 237.4
  Top Layer w12: R22.2 9950,8900 U2.2
NetR31_2: R31.2 R32.1 | length 204.1
  Top Layer w12: R32.1 9775,9355 R31.2@9785,9365
NetR32_2: R32.2 U3.3 | length 381.8
  Top Layer w12: U3.3 9460,9110 9585,8985 R32.2
NetR33_2: R33.2 U3.2 | length 348.5
  Top Layer w12: R33.2 8980,8865 9085,8970 U3.2
NetR34_1: R34.1 U31.8 | length 261.9
  Top Layer w12: U31.8 9720,10255 9735,10270 9765,10270 9789.53,10294.53 R34.1
NetR39_2: "U21 - Master.26" "U32 - Slave.14" R39.2 | length 7649.7
  Top Layer w12: v1(8680,9575) 8515,9410 8220,9410 8110,9300 8110,9000 8495,8615 11190,8615 11595,9020 v1(11595,9385) ; 11110,10570 11330,10570 R39.2
  Bottom Layer w12: v1@8685,9580 8755,9650 8940,9650 9015,9575 9165,9575 ; R39.2 11350,10440 11600,10190 11740,10190 11905,10025 11910,10025 11910,9610 11785,9485 11635,9485 11595,9445 v1(11595,9385)
NetR40_2: "U21 - Master.25" "U32 - Slave.15" R40.2 | length 7592.2
  Top Layer w12: v1(8845,9545) 8745,9545 8555,9355 8280,9355 8205,9280 8205,9020 8565,8660 11170,8660 11475,8965 v1(11475,9390) ; 11110,10470 11240,10470 11350,10360 R40.2
  Bottom Layer w12: v1(8845,9545) 8905,9485 9280,9485 9370,9575 9465,9575 ; R40.2 11350,10260 11460,10150 11725,10150 11880,9995 11880,9620 11775,9515 11550,9515 11475,9440 v1(11475,9390)
NetRSC_2: RSC.2 U11.13 | length 1389.6
  Bottom Layer w12: U11.13 9540,6230 9570,6200 9570,6085 9680,5975 10540,5975 10575,6010 10575,6115 RSC.2
NetRSC_8: RSC.8 U11.21 | length 1094.9
  Top Layer w12: v1(9660,6295) 9660,6475 9680,6495 v1(9685,6495)
  Bottom Layer w12: v1(9660,6295) 9660,6100 9725,6035 9885,6035 RSC.8 ; v1(9685,6495) 9685,6695 9720,6730 U11.21
NetU1_1: U1.1 U11.23 | length 232.6
  Top Layer w12: U11.23 9885,6930 9939.49,6875.51 U1.1
NetU1_4: U1.4 U11.24 | length 473.5
  Top Layer w12: U11.24 9880,7030 9940,6970 10135,6970 10145,6960 U1.4
NetU2_1: "U21 - Master.13" U2.1 | length 1015.3
  Top Layer w12: U2.1 10325,9570 10810,9570
NetU3_1: "U32 - Slave.13" U3.1 | length 640.1
  Top Layer w12: U3.1 8995,9300 8995,9620 9050,9675 9165,9675
NetU31_1: "U32 - Slave.23" U31.1 | length 595.4
  Top Layer w12: 9465,10375 9550,10375 9620,10305 9620,10010 9659.49,9970.51 U31.1
NetU31_4: "U32 - Slave.24" U31.4 | length 1806.1
  Top Layer w12: 9470,10470 9465,10475 9600,10475 9725,10600 9725,10685 9730,10690 9725,10695 9820,10790 9960,10790 10185,10565 10185,10165 9990.51,9970.51 U31.4
"NetU32 - Slave_2": "U32 - Slave.2" VR31.2 | length 1237.8
  Top Layer w12: 9165,10775 9065,10775 9005,10835 9005,11020 9175,11190 9490,11190 9665,11365 VR31.2
"NetU32 - Slave_3": "U32 - Slave.3" VR32.2 | length 956.2
  Top Layer w12: 9165,10675 9050,10675 8955,10770 8955,11040 9225,11310 VR32.2
"NetU32 - Slave_4": "U32 - Slave.4" VR33.2 | length 1017.4
  Top Layer w12: VR33.2 8710,10955 9090,10575 9165,10575
"NetU32 - Slave_5": "U32 - Slave.5" VR36.2 | length 1373.8
  Top Layer w12: VR36.2 8475,11065 8550,11065 9005,10610 9005,10560 9090,10475 9165,10475
VCC: "U21 - Master.20" "U32 - Slave.20" J3.1 J31.1 LCD2.2 LCD2.15 P2.2 P2.15 P31.5 R35.1 R36.1 R39.1 R40.1 VR2.3 VR21.1 VR31.1 VR32.1 VR33.1 VR35.1 VR36.1 | length 22942.4
  Top Layer w12: VR21.1 6945,9060 7075,9190 7075,9385 7025,9435 6820,9435 6795,9410 ; LCD2.2 5720,10990 5755,11025 5755,11090 5735,11110 5700,11110 5610,11200 5610,11375 5715,11480 6000,11480 6335,11145 6890,11145 7020,11015 ; P2.15 6795,9410 ; LCD2.15 7020,11015 ; 9465,10075 9385,10075 9325,10135 9325,10980 9455,11110 R35.1 10095,11255 ; VR31.1@9830,11575 9990,11575 10095,11470 10095,11255 ; v1(10620,11575) 10650,11545 12470,11545 12760,11255 P31.5 12760,11100 12830,11030 12830,10865 J31.1 12675,10805 12535,10665 11965,10665 R39.1 R40.1 ; R36.1 11005,11100 11005,11240 10850,11395 10235,11395 10095,11255 ; 11110,9970 11480,9970 VR2.3 11510,10085 11550,10125 11800,10125 11850,10175 R40.1 ; J3.1 12775,10185 12740,10220 12365,10220 12300,10285 R40.1 ; 6795,9410 6795,9455 7285,9945 7285,11060 7245,11100 7095,11100 7020,11025 7020,11015
  Bottom Layer w12: P2.2 5495,9220 5540,9175 5630,9175 5710,9095 VR21.1 ; VR35.1 5685,11100 5620,11165 5620,11420 5705,11505 6025,11505 6350,11180 7815,11180 7915,11280 7915,11640 8000,11725 8200,11725 8285,11640 ; VR36.1@8285,11570 8285,11640 ; VR33.1@8810,11575 8810,11675 ; VR32.1@9325,11575 9325,11680 ; VR31.1@9830,11575 9830,11665 9795,11700 9345,11700 9325,11680 ; v1(10395,11395) 10575,11575 v1(10620,11575) ; 8285,11640 8285,11655 8350,11720 8765,11720 8810,11675 ; 8810,11675 8810,11685 8835,11710 9295,11710 9325,11680
VCC1: BME280.1 C1.1 J1.1 J11.1 LCD1.2 LCD1.15 MAX31855.1 P11.2 RSC.7 SHT75.2 U1.3 U11.20 VR1.1 | length 11073
  Top Layer w12: v1@10095,6725 U1.3 ; MAX31855.1 10625,7385 10699.53,7310.47 C1.1
  Bottom Layer w12: LCD1.2 6160,7280 6190,7250 7425,7250 7460,7285 LCD1.15 7460,7570 7490,7600 8995,7600 9050,7545 9050,7425 ; VR1.1 9050,7425 ; U11.20 9830,6630 ; RSC.7 10070,6445 10055,6460 ; v1(10100,6725) 9925,6725 9885,6685 ; P11.2 10420,6550 ; MAX31855.1 10515,7605 10475,7645 10030,7645 9885,7500 ; BME280.1 10985,6430 ; J1.1 11855,7495 11915,7495 11980,7430 11980,6900 11795,6715 J11.1 11670,6670 11630,6630 11630,6575 11535,6480 11020,6480 10985,6445 10985,6430 ; 9050,7425 9195,7570 9855,7570 9885,7540 9885,7500 ; 9830,6630 9845,6630 9875,6600 9875,6495 9905,6465 10050,6465 10055,6460 ; 9830,6630 9885,6685 ; 9885,6685 9885,7500 ; 10055,6460 10330,6460 10420,6550 ; 10420,6550 10420,6535 10485,6470 10945,6470 10985,6430
pads on no net: "U21 - Master.1" "U21 - Master.2" "U21 - Master.3" "U21 - Master.4" "U21 - Master.5" "U21 - Master.6" "U21 - Master.7" "U21 - Master.14" "U21 - Master.15" "U21 - Master.16" "U21 - Master.17" "U21 - Master.18" "U21 - Master.23" "U21 - Master.24" "U32 - Slave.1" "U32 - Slave.6" "U32 - Slave.7" "U32 - Slave.17" "U32 - Slave.18" "U32 - Slave.25" BME280.2 BME280.5 BME280.7 J1.2 J1.3 J1.5 J1.7 J1.9 J1.10 J1.11 J1.12 J1.MH1 J1.MH2 J1.MH3 J1.MH4 J3.2 J3.3 J3.5 J3.7 J3.9 J3.10 J3.11 J3.12 J3.MH1 J3.MH2 J3.MH3 J3.MH4 J11.2 J11.3 J11.5 J11.7 J11.9 J11.10 J11.11 J11.12 J11.MH1 J11.MH2 J11.MH3 J11.MH4 J31.2 J31.3 J31.5 J31.7 J31.9 J31.10 J31.11 J31.12 J31.MH1 J31.MH2 J31.MH3 J31.MH4 LCD1. LCD2.M1 LCD2.M2 LCD2.M3 LCD2.M4 MAX31855.2 P31.3 P31.4 SW3.1 SW3.4 SW3.5 SW3.6 U1.2 U1.5 U11.1 U11.4 U11.5 U11.14 U11.15 U11.16 U11.17 U11.18 U11.22 U31.2 U31.5 VR2.2

## Polygon pours and split planes (outlines as drawn)
GND on Top Layer "Top Layer-No Net" (solid, pour order 14): 5015,11990 13270,11990 13270,8480 13260,8490 5015,8490
GND1 on Top Layer "Top Layer-No Net" (solid, pour order 4): 5495,7940 12175,7940 12165,7930 12165,5840 5505,5840 5495,5850
GND on Bottom Layer "Top Layer-No Net" (solid, pour order 12): 5025,11990 13270,11990 13270,8480 5010,8480 5005,8485 5010,8480 5015,8480
GND1 on Bottom Layer "Top Layer-No Net" (solid, pour order 6): 5495,7940 12175,7940 12175,5840 12165,5850 5495,5850

## Keep-outs
Keep-Out Layer:
  lines w12: 5015,8480 13270,8480 13270,11990 5015,11990 5015,8480 ; 5495,5840 12175,5840 12175,7940 5495,7940 5495,5840

## Silkscreen, mask and mechanical layers (free items; w line width, h text height)
Top Overlay:
  text "2 layer, full fill blue color, 2pcs" at 6605,12245 h120
  text "2 layer, full fill blue color, 2pcs" at 8945,11220 h120
  text "2 layers, full fill blue color, 5 pcs" at 7250,8120 h120